# EAGLE board Leiterplatte v5 (EAGLE 9.7.0)
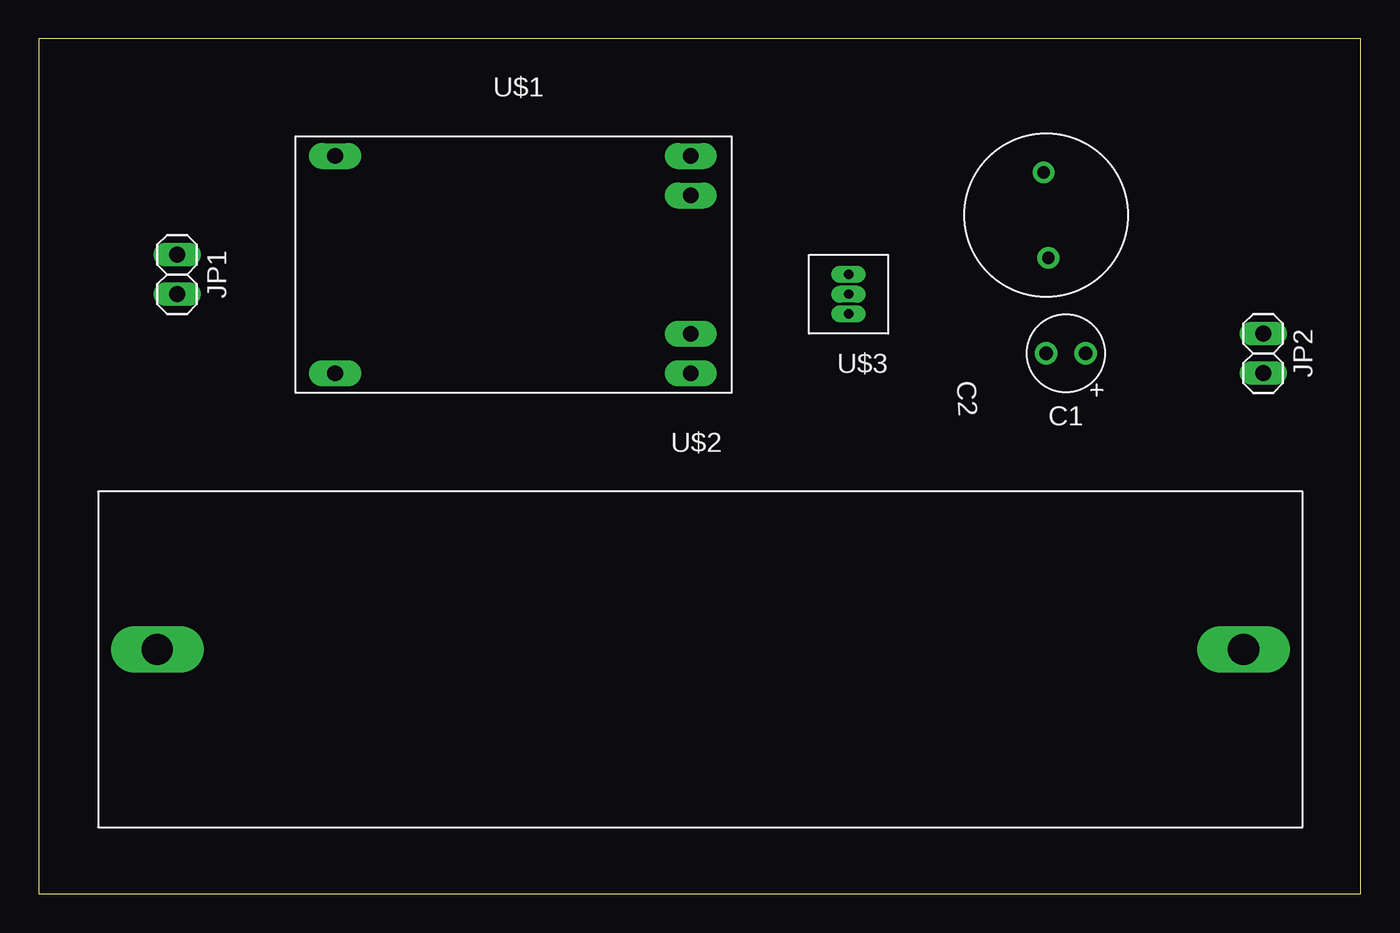
[diagram p0: board, top side]
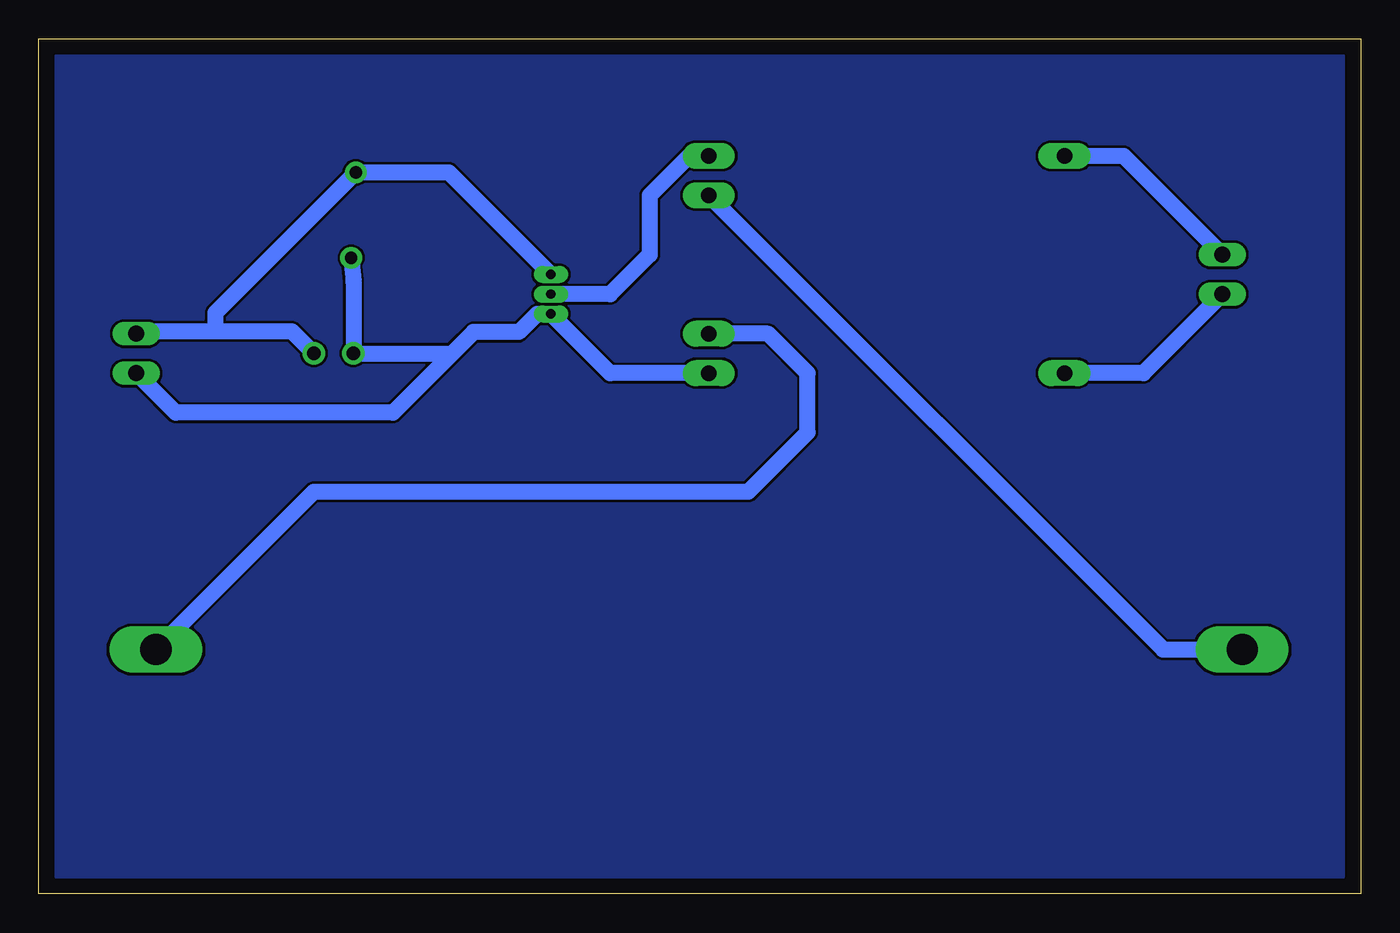
[diagram p1: board, bottom side, seen from below]

Size 85 x 55 mm. Coordinates in mm from the lower left corner, seen from the top.
Outline: 0,0 85,0 85,55 0,55 0,0
Copper layers (1*16): Top / Bottom
Stack-up Default Layer Stack: Top User Defined 0.035mm / Dielectric-1 User Defined 1.5mm / Bottom User Defined 0.035mm
Design rules: minimum copper width 6mil, minimum drill size 0.35mm, copper clearance wire_polygon to wire_polygon 6mil, copper clearance wire_polygon to pad_smd 6mil, copper clearance wire_polygon to via 6mil, copper clearance pad_smd to pad_smd 6mil, copper clearance pad_smd to via 6mil, copper clearance via to via 6mil, copper clearance smd to pad (same net) 6mil, copper clearance smd to via (same net) 6mil, copper clearance smd to smd (same net) 6mil, dimension clearance 40mil, restrict clearance 0mil, via restrict clearance 0mil, drill distance 6mil, keepout clearance 0mil
Holes 0.35 mm at 115.57,58.9

## Footprints (pad centres in the part's own frame; a part is rotated, then mirrored left to right if it is on the bottom)
CAPPRD254W65D500H1150B = drill 0.85 pad 1.45: 1 -1.27,0; 2 1.27,0
CAPRD550W60D1025H1250B = drill 0.8 pad 1.4: 1 -2.75,0; 2 2.75,0
1X02 = drill 1.016 long: 1 -1.27,0; 2 1.27,0
LADEREGLER = drill 1 pad 1.676 long: 1 -11.43,6.35; 2 -11.43,-7.62; 3 11.43,6.35; 4 11.43,3.81; 5 11.43,-5.08; 6 11.43,-7.62
AKKUHALTER = drill 2 long: 1 -35.56,0; 2 34.29,0
SPANNUNGSREGLER = drill 0.6 long: GND 0,1.27; IN 0,0; OUT 0,-1.27

## Placement (x,y rotation side)
C1  [CAPPRD254W65D500H1150B]  66.04,34.77 180 top
C2  [CAPRD550W60D1025H1250B]  64.77,43.66 93.1 top
JP1  PINHD-1X2  [1X02]  8.89,39.85 270 top
JP2  PINHD-1X2  [1X02]  78.74,34.77 270 top
U$1  LADEREGLER  [LADEREGLER]  30.48,41.12 0 top
U$2  AKKUHALTER  [AKKUHALTER]  43.18,15.72 0 top
U$3  SPANNUNGSREGLER  [SPANNUNGSREGLER]  52.07,38.58 180 top

## Library data of the parts
C1 = Tinkercad
C2 = Capacitor; CATEGORY: Capacitor; PACKAGE_SIZE: 12.5MM-DIA; PACKAGE_TYPE: Through Hole; SUBCATEGORY: Aluminum Non-Polar Capacitors; TYPE: Radial Can
JP1 JP2 = Connector; CATEGORY: Connectors; DESCRIPTION: Header-Straight-2 Position; PACKAGE_TYPE: Through Hole; PITCH: 0.100" (2.54mm); SUBCATEGORY: Headers; TYPE: Male Pins
U$1 U$3 = Spannungsregler
U$2 = Akkuhalter

## Nets
N$1: JP1.1 U$1.1
N$2: JP1.2 U$1.2
N$3: U$1.4 U$2.1
N$4: U$1.5 U$2.2
N$5: U$1.3 U$3.IN
N$6: C1.2 C2.1 JP2.2 U$1.6 U$3.GND
N$7: C1.1 C2.2 JP2.1 U$3.OUT

## Tracks (layer width: path | path; a pad name or v marks a point on that pad's centre or on a via)
GND
  pour Bottom: -5.08,76.68 -5.08,-19.84 158.75,-19.84 158.75,76.68
N$1
  Bottom 1.016: JP1.1 15.24,47.47 U$1.1
N$2
  Bottom 1.016: JP1.2 13.97,33.5 U$1.2
N$3
  Bottom 1.016: U$1.4 12.7,15.72 U$2.1
N$4
  Bottom 1.016: U$1.5 38.1,36.04 35.56,33.5 35.56,29.69 39.37,25.88 67.31,25.88 U$2.2
N$5
  Bottom 1.016: U$3.IN 48.26,38.58 45.72,41.12 45.72,44.93 43.18,47.47 U$1.3
N$6
  Bottom 1.016: U$1.6 48.26,33.5 U$3.GND 52.96,37.31 54.13,36.14 57.05,36.14 58.42,34.77 | 58.42,34.77 62.23,30.96 76.2,30.96 JP2.2 | C2.1 64.77,39.38 C1.2 58.42,34.77
N$7
  Bottom 1.016: JP2.1 78.59,36.19 73.66,36.19 | 73.66,36.19 68.73,36.19 C1.1 | U$3.OUT 58.63,46.41 C2.2 73.66,37.37 73.66,36.19